# Altium PCB PCB1.PcbDoc
Units mil, origin at the board's own origin, x right, y up, seen from the top; angles counter-clockwise.
Board outline 1885 x 1460 mil, 4 copper layers (Top Layer, Int1 (GND), Int2 (PWR), Bottom Layer), stack 53.912 mil thick; 69 components, 53 nets, 227 pads, 67 vias.
Unrouted connection lines stored in the file: 5.
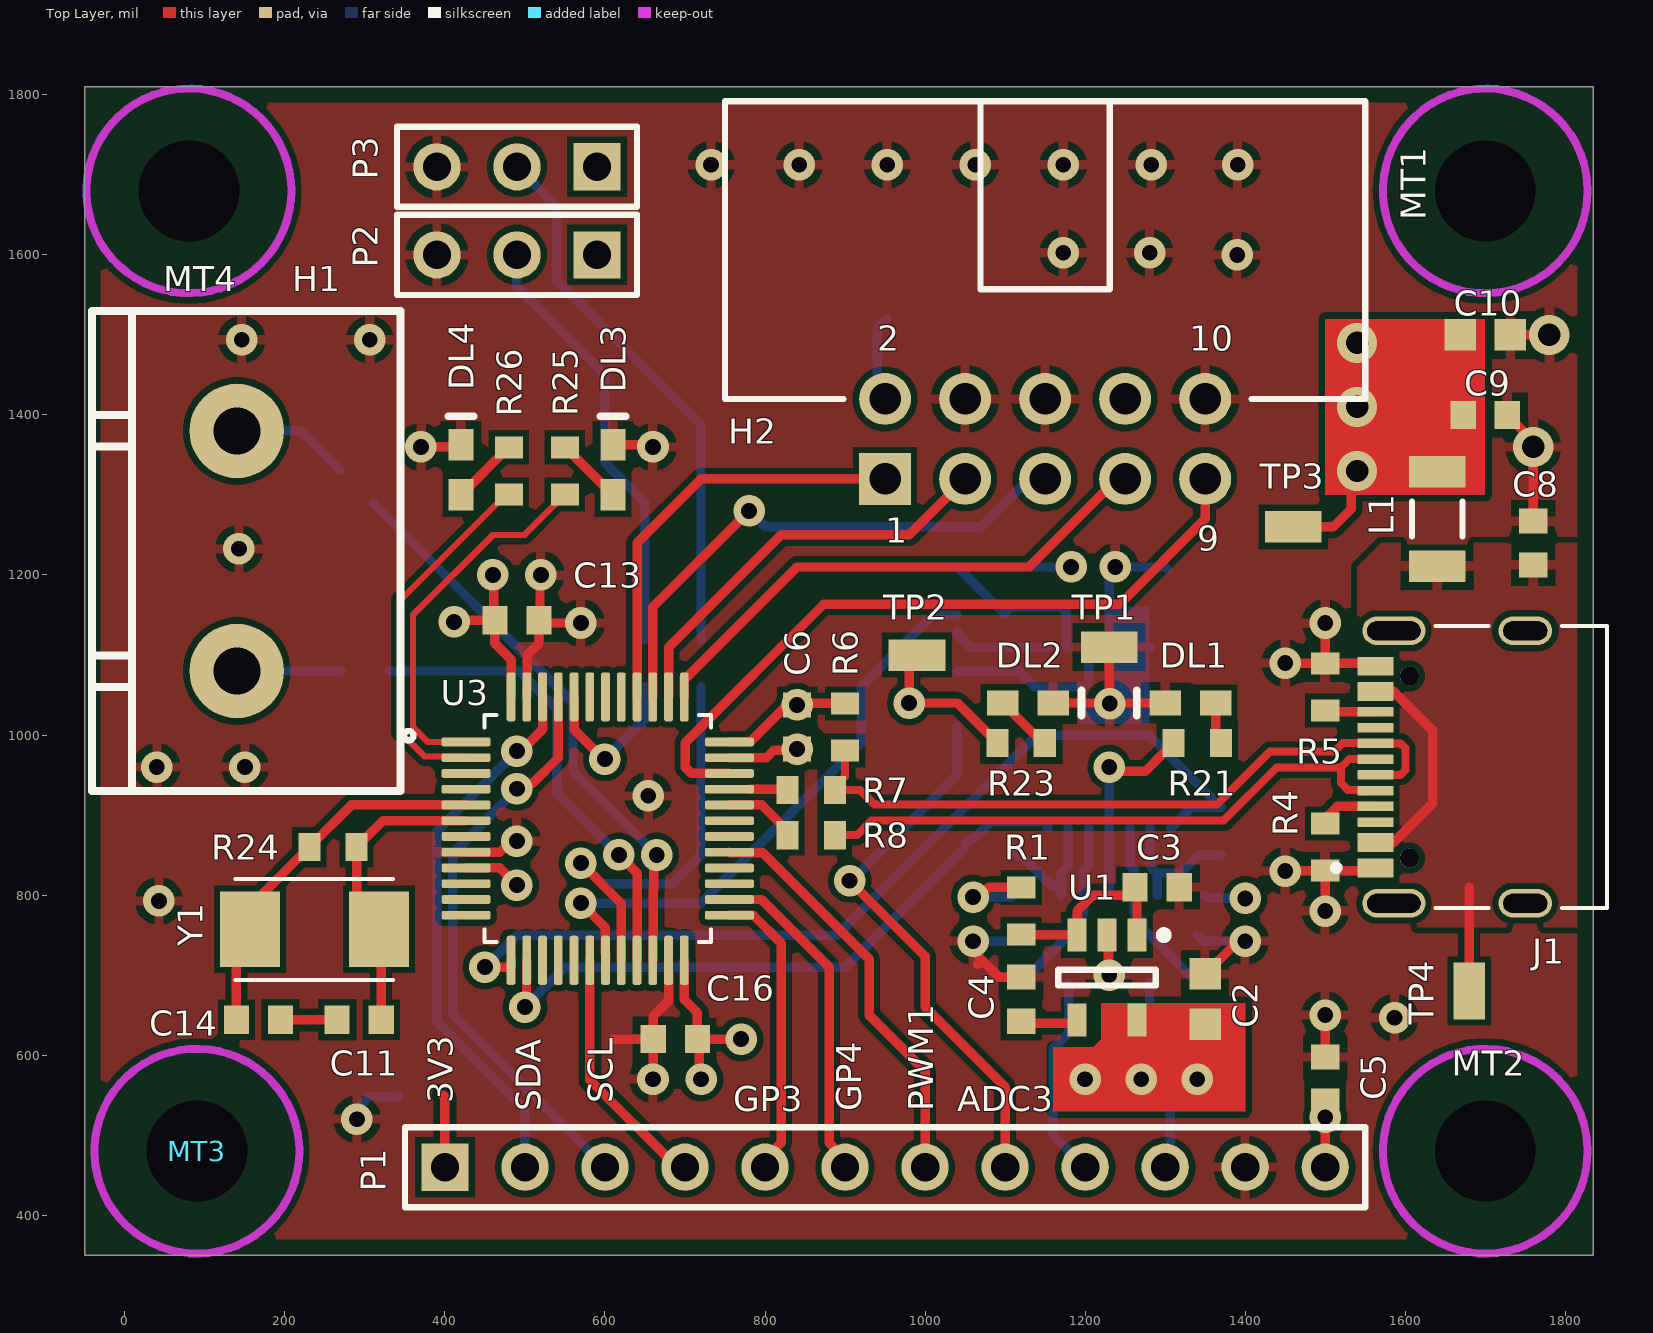
[diagram p0: Top Layer view]
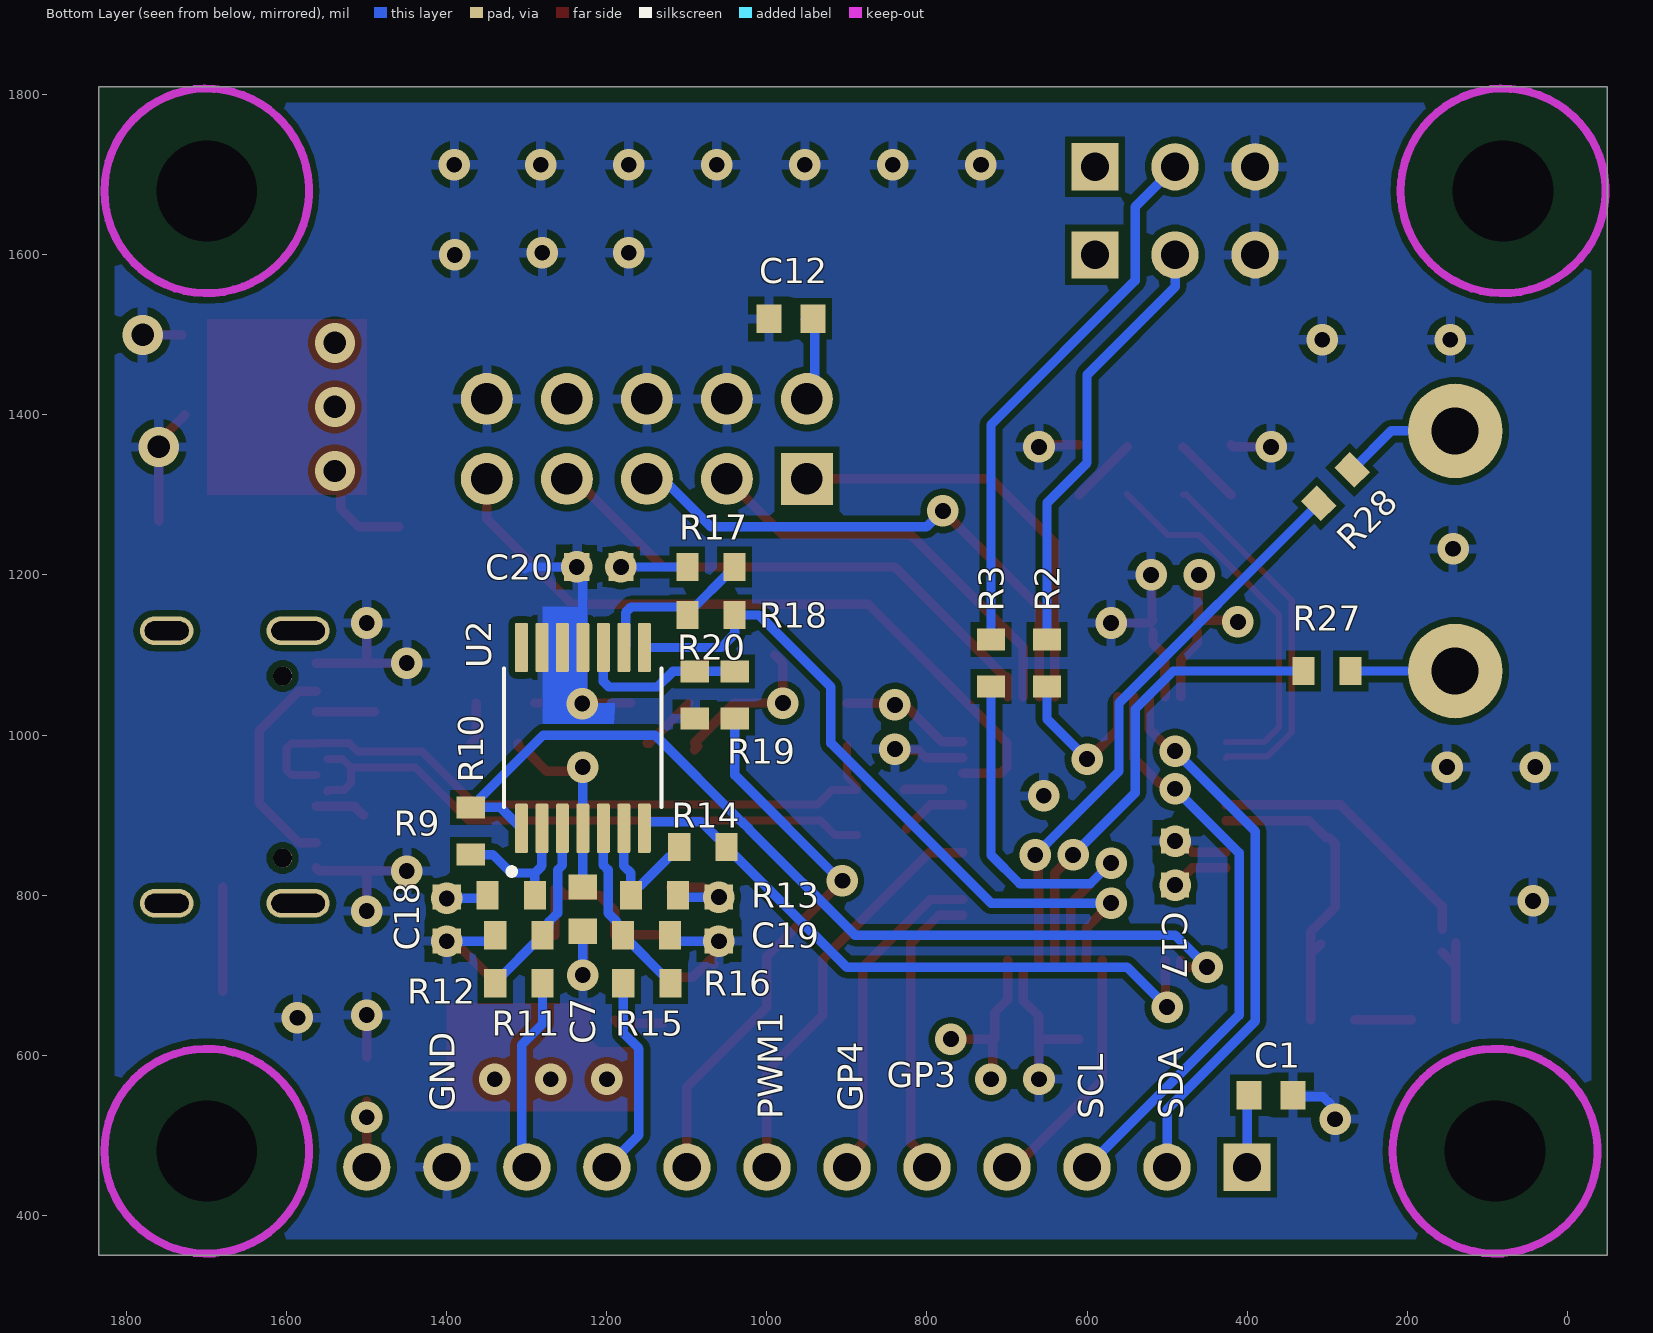
[diagram p1: Bottom Layer view, seen from below]
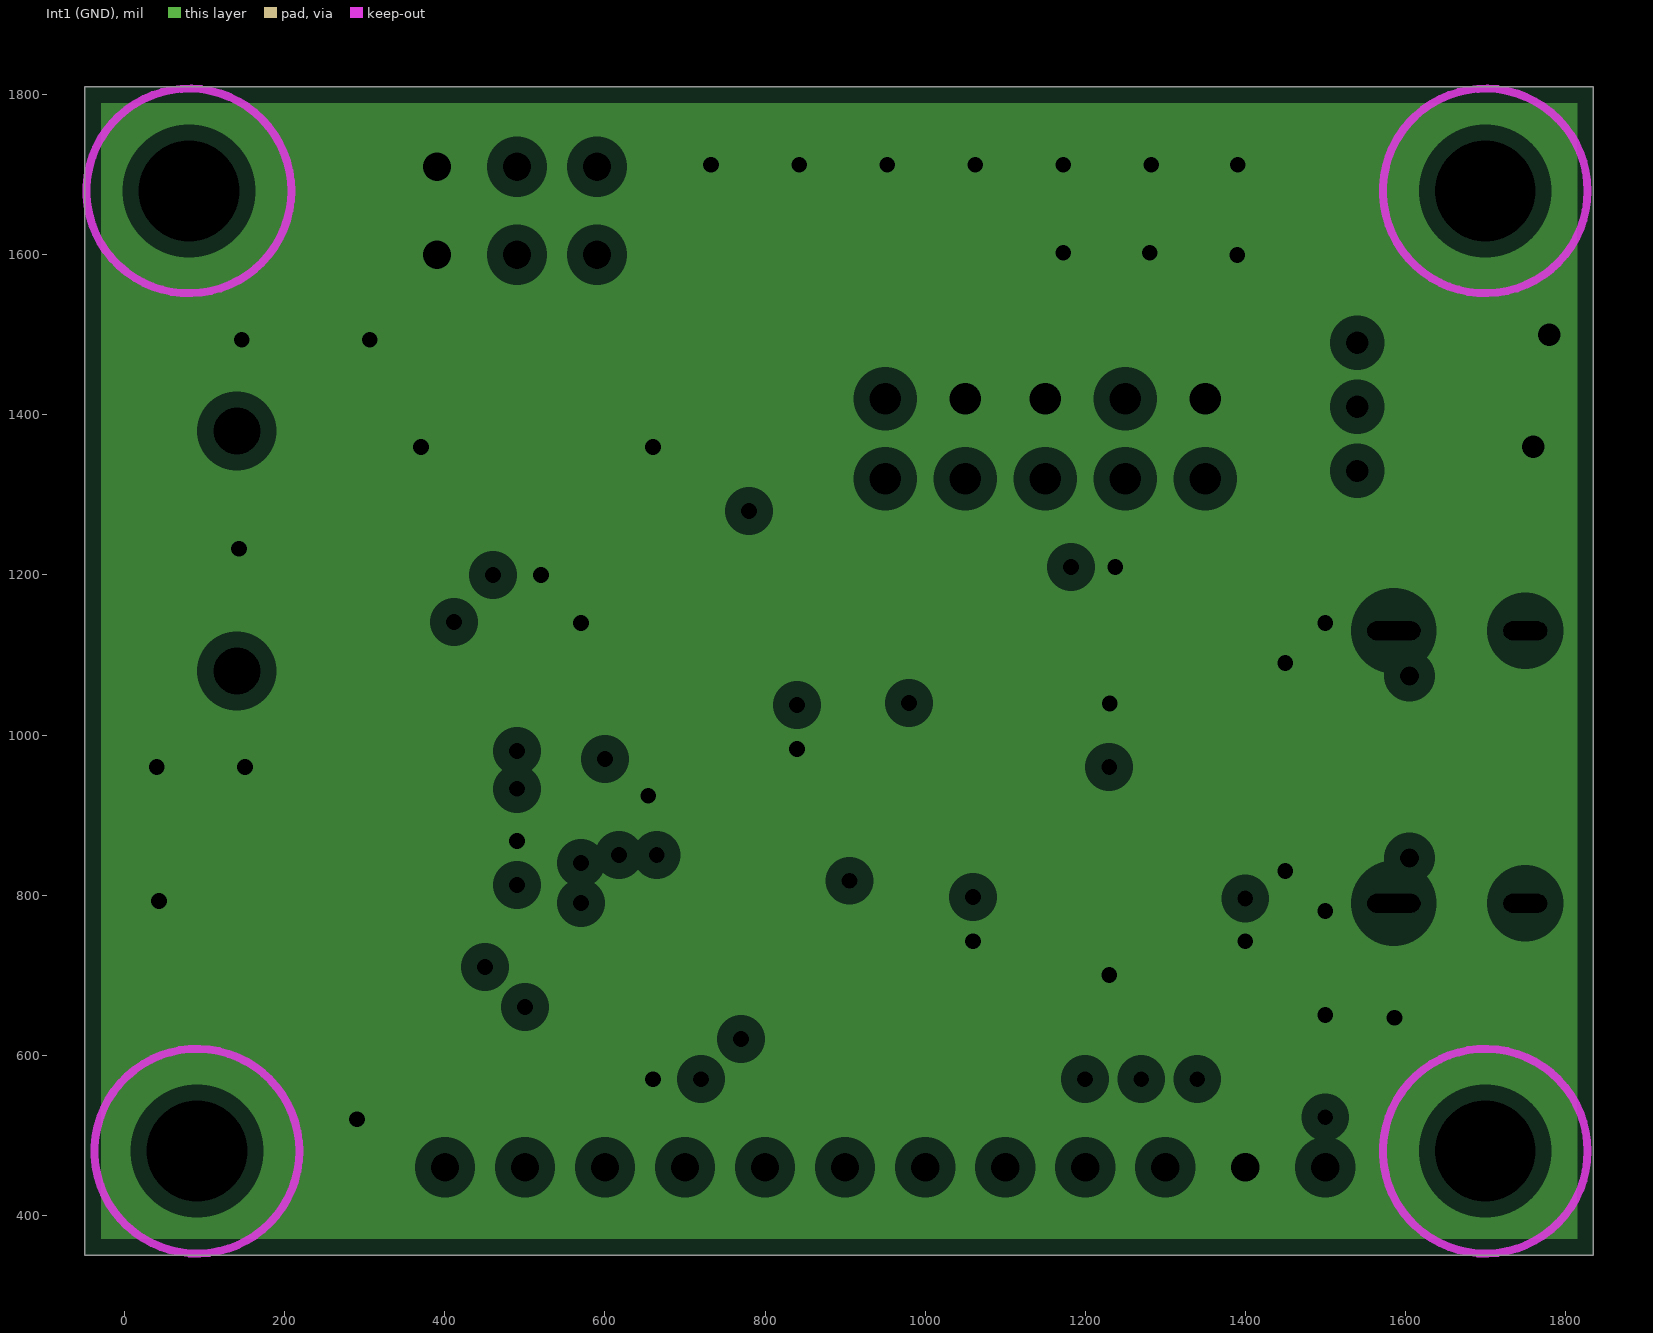
[diagram p2: Int1 (GND), clearances drawn from the general rule]
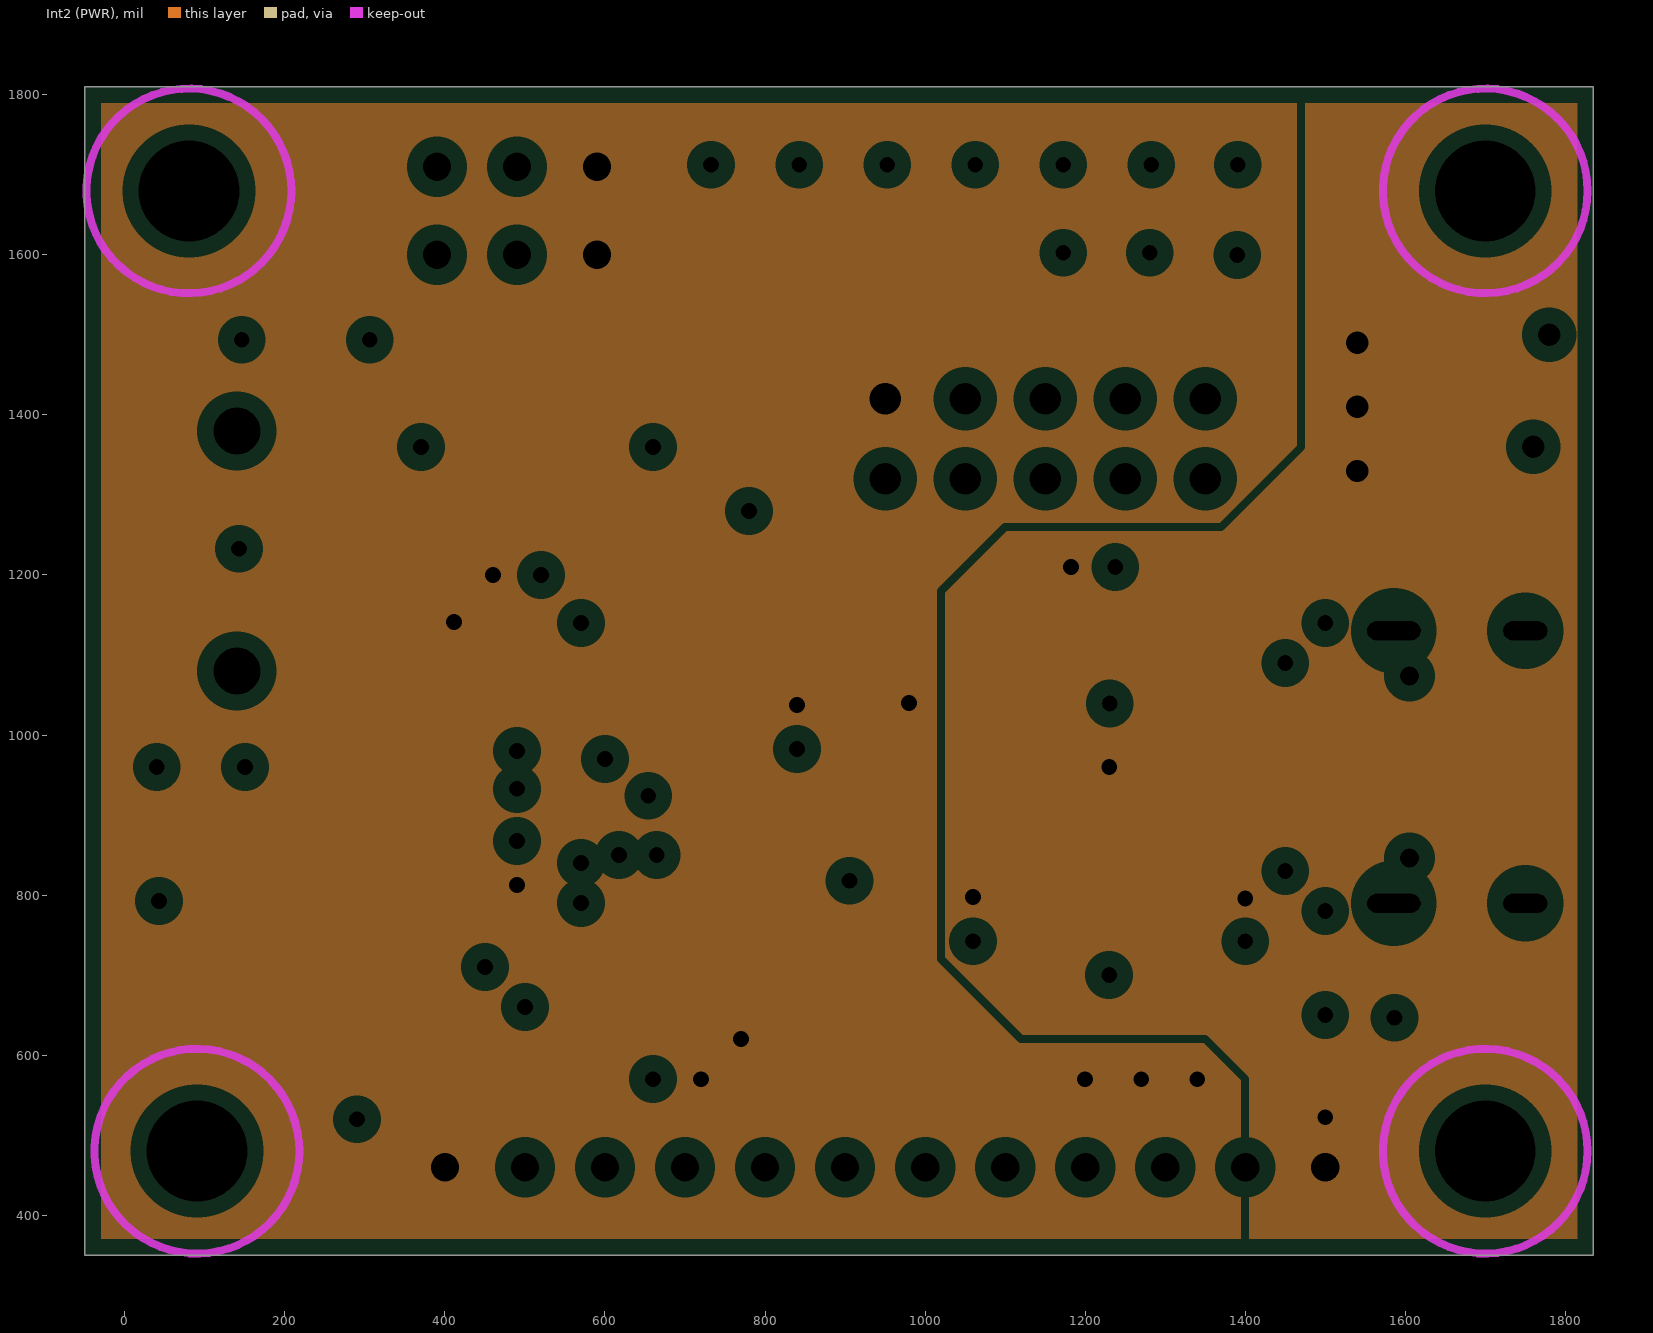
[diagram p3: Int2 (PWR), clearances drawn from the general rule]

## Layer stack, top to bottom
Top Solder: solder mask 1, SM-001, Dk 4
Top Layer: signal copper 1.378
Dielectric 1: prepreg 5.1, PP-017, Dk 4.3
Dielectric 2: prepreg 5.1, PP-017, Dk 4.3
Int1 (GND): plane copper 1.378, net GND
Dielectric 3: core 28, Core-039, Dk 4.8
Int2 (PWR): plane copper 1.378, net (Multiple Nets)
Dielectric 4: prepreg 5.1, PP-017, Dk 4.3
Dielectric 5: prepreg 5.1, PP-017, Dk 4.3
Bottom Layer: signal copper 1.378
Bottom Solder: solder mask 1, SM-001, Dk 4

## Board outline
-50,350 1835,350 1835,1810 -50,1810

## Design rules (kind name [scope] priority, off if disabled: settings)
BoardOutlineClearance [All] p1: gap=19.68 ignorepadtopadclearanceinfootprint=FALSE
Clearance GND_POLY [InNamedPolygon('GND')] p1: gap=10 ignorepadtopadclearanceinfootprint=FALSE
Clearance Min_Clearance_Circuit_Labs [All] p2: gap=7.87 ignorepadtopadclearanceinfootprint=FALSE
DiffPairsRouting [All] p1: maxlimit=10 minlimit=10 mostfreqgap=10 toplayer_minwidth=10 toplayer_maxwidth=10 toplayer_prefwidth=10 bottomlayer_minwidth=10 bottomlayer_maxwidth=10 bottomlayer_prefwidth=10 maxuncoupledlength=500
FanoutControl Fanout_BGA [IsBGA] p1 off: bgadir=Out bgaviamode=Centered fanoutstyle=Auto fanoutdirection=Alternating viagrid=1 // Fanout_BGA (Default Rule)
Height [All] p1: minheight=0 maxheight=2000 prefheight=500
HoleSize [All] p1: absolutevalues=TRUE maxlimit=393.7 minlimit=11.81 maxpercent=80.000 minpercent=20.000
MinimumAnnularRing [All] p1: minimumring=3.94
MinimumSolderMaskSliver [All] p1: minsoldermaskwidth=4
NetAntennae [All] p1: netantennaetolerance=39.37
PlaneClearance [All] p1: clearance=20
PlaneConnect [All] p1: planeconnectstyle=Relief reliefexpansion=20 reliefentries=4 reliefconductorwidth=10 reliefairgap=10
PolygonConnect [All] p1: connectstyle=Relief reliefconductorwidth=12 reliefentries=4 polygonreliefangle="90 Angle" airgapwidth=10
RoutingVias [All] p1: holewidth=19.68 width=39.37 viastyle="Through Hole" minholewidth=11.81 minwidth=31.5 maxholewidth=39.37 maxwidth=78.74
SMDNeckDown [All] p1 off: percent=50.000
SMDToCorner [All] p1: distance=98425
SMDToPlane [All] p1: distance=1968504
SilkToSolderMaskClearance SilkscreenOverComponentPads [IsPad] p1: minsilkscreentomaskgap=7.87 clearancetoexposedcopper=TRUE
SolderMaskExpansion [All] p1: expansion=4 istentingtop=FALSE
SupplyNets "Schematic Supply Nets_3" [InNet('GND')] p1: voltage=0.000
SupplyNets "Schematic Supply Nets_2" [InNet('VUSB')] p2: voltage=0.000
SupplyNets "Schematic Supply Nets_1" [InNet('5V')] p3: voltage=0.000
SupplyNets "Schematic Supply Nets" [InNet('3V3')] p4: voltage=0.000
ViasUnderSMD [All] p1: allowed=FALSE
Width [All] p1: maxlimit=78.74 minlimit=7.87 preferedwidth=11.81
21 further rules are at their usual default settings.

## Classes and differential pairs
differential pair DD: +DD_P -DD_N

## Components (designator, comment, footprint, x,y, rotation, side; value= is the part's Value field where it differs from the comment)
C1 "100nF" CAPC1608L 370,550 r180 bottom
C2 "4.7uF" CAPC1608N 1350,670 r90 top
C3 "1uF" CAPC1608L 1290,810 r0 top
C4 "10nF" CAPC1608L 1120,670 r90 top
C5 "100nF" CAPC1608L 1500,570 r270 top
C6 "100nF" CAPC1608L 840,1010 r90 top
C7 "100nF" CAPC1608L 1230,782.44 r90 bottom
C8 "100nF" CAPC1608L 1760,1240 r90 top
C9 "100nF" CAPC1608L 1700,1400 r0 top
C10 "4.7uF" CAPC1608N 1700,1500 r180 top
C11 "10pF" CAPC1608L 292.79,643.98 r0 top value=20pF
C12 "100nF" CAPC1608L 970,1520 r180 bottom
C13 "100nF" CAPC1608L 489.96,1143.47 r180 top
C14 "10pF" CAPC1608L 166.96,643.98 r180 top value=20pF
C16 "100nF" CAPC1608L 687.95,620.21 r0 top
C17 "100nF" CAPC1608L 490,840 r270 bottom
C18 "100nF" CAPC1608L 1400,770 r90 bottom
C19 "100nF" CAPC1608L 1060,770 r90 bottom
C20 "100nF" CAPC1608L 1210,1210 r180 bottom
DL1 "Blue" WL-SMCW0603 1300,1040 r0 top
DL2 "Green" WL-SMCW0603 1160,1040 r180 top
DL3 "Red" WL-SMCW0603 610,1362.99 r270 top
DL4 "Green" WL-SMCW0603 420,1362.99 r270 top
H1 "TERM_BLK_2POS" TERM_BLK_2POS 140,1080 r90 top
H2 "HDR_IDC_5X2H_RA" IDC2.54-H10C 1150,1420 r0 top
J1 "TYPE-C-31-M-12" HRO_TYPE-C-31-M-12 1750,960 r90 top
L1 "1A max, Idc 0.3R," INDC3216L 1640,1270 r90 top
MT1 "M3.2 NPTH" MNT-HOLE_3.2mm_NPTH 1700,1680 r0 top
MT2 "M3.2 NPTH" MNT-HOLE_3.2mm_NPTH 1700,480 r0 top
MT3 "M3.2 NPTH" MNT-HOLE_3.2mm_NPTH 90,480 r0 top
MT4 "M3.2 NPTH" MNT-HOLE_3.2mm_NPTH 80,1680 r0 top
P1 "JA_PIN_Header 12" HDR1X12 400,460 r0 top
P2 "JA_PIN_Header 3" HDR1X3 590,1600 r180 top
P3 "JA_PIN_Header 3" HDR1X3 590,1710 r180 top
R1 "0R" RESC1608L 1120,780 r90 top
R2 "100K" RESC1608L 650,1090 r90 bottom
R3 "100K" RESC1608L 720,1090 r270 bottom
R4 "5K1" RESC1608L 1500,860 r270 top
R5 "5k1" RESC1608L 1500,1060 r90 top
R6 "1K5" RESC1608L 900,1010 r270 top
R7 "27" RESC1608L 857.66,931.34 r0 top
R8 "27" RESC1608L 857.66,874.77 r0 top
R9 "1K0" RESC1608L 1319.53,800 r180 bottom
R10 "2K0" RESC1608L 1370,880 r90 bottom
R11 "430R" RESC1608L 1310,690 r0 bottom
R12 "430R" RESC1608L 1310,750 r180 bottom
R13 "1K0" RESC1608L 1140.47,800 r0 bottom
R14 "2K0" RESC1608L 1080,860 r180 bottom
R15 "430R" RESC1608L 1150,690 r180 bottom
R16 "430R" RESC1608L 1150.47,750 r0 bottom
R17 "1K0" RESC1608L 1070,1210 r180 bottom
R18 "2K0" RESC1608L 1070,1150 r180 bottom
R19 "430R" RESC1608L 1040,1050 r90 bottom
R20 "430R" RESC1608L 1090,1050 r90 bottom
R21 "1K5" RESC1608L 1340,990 r180 top
R23 "2K" RESC1608L 1120,990 r180 top
R24 "10K" RESC1608L 260,860 r0 top
R25 "3K" RESC1608L 550,1330 r270 top
R26 "2K" RESC1608L 480,1330 r270 top
R27 "100R" RESC1608L 300,1080 r180 bottom
R28 "100R" RESC1608L 289.53,1310.47 r135 bottom
TP1 "TP_0603" TP_0603 1230,1110 r180 top
TP2 "TP_0603" TP_0603 990,1100 r0 top
TP3 "TP_0603" TP_0603 1460,1260 r0 top
TP4 "TP_0603" TP_0603 1680,680 r90 top
U1 "CAT6219-330TDGT3" SOT95P280X145-5N 1227.4,696.85 r270 top
U2 "LMV774MT" SOP65P640X120-14N 1230,996.38 r90 bottom
U3 "STM32F103C8T6" QFP50P900X900X160-48N 590.89,883.08 r0 top
Y1 "ABM3-8.000MHZ-D2Y-T" XTAL_ABM3-8.000MHZ-D2Y-T 236.95,757.12 r0 top

## Footprints (in the part's own frame and the unit in brackets; to place one, negate y for a bottom-side part, rotate by r counter-clockwise, add the part's x,y. Pads: shape width x height; smd on the part's side, far side on the other; paste and mask are expansions set on the pad)
CAPC1608L [mm] "Chip Capacitor, Body 1.6x0.8mm, IPC High Density"
  rect 0.8x0.9 smd: 1(-0.7,0) 2(0.7,0)
  body extent -0.87,-0.48 0.87,0.48, height 0.85
CAPC1608N [mm] "Chip Capacitor, Body 1.6x0.8mm, IPC Medium Density"
  rect 1x1 smd: 1(-0.8,0) 2(0.8,0)
  body extent -0.87,-0.48 0.87,0.48, height 0.85
HDR1X3 [mm] "Connector; Header; 3 Position"
  rect 1.5x1.5 hole 0.9: 1(0,0)
  round 1.5 hole 0.9: 2(2.54,0) 3(5.08,0)
  silkscreen extent -1.27,-1.27 6.35,1.27, body extent -1.27,-1.27 6.35,1.27, height 8.89
HDR1X12 [mm] "Connector; Header; 12 Position"
  rect 1.5x1.5 hole 0.9: 1(0,0)
  round 1.5 hole 0.9: 2(2.54,0) 3(5.08,0) 4(7.62,0) 5(10.16,0) 6(12.7,0) 7(15.24,0) 8(17.78,0) 9(20.32,0) 10(22.86,0) 11(25.4,0) 12(27.94,0)
  silkscreen extent -1.27,-1.27 29.21,1.27, body extent -1.24,-1.24 29.24,1.3, height 8.89
HRO_TYPE-C-31-M-12 [mm]
  rect 0.6x1.14 smd mask+0.05: A1_B12(-3.2,4.75) A4_B9(-2.4,4.75) B1_A12(3.2,4.75) B4_A9(2.4,4.75)
  rect 0.3x1.14 smd mask+0.05: A5(-1.25,4.75) A6(-0.25,4.75) A7(0.25,4.75) A8(1.25,4.75) B5(1.75,4.75) B6(0.75,4.75) B7(-0.75,4.75) B8(-1.75,4.75)
  oval 0.9x2 hole 0.6 slot 1.7 at 90 deg: S1(-4.325,4.17) S2(4.325,4.17)
  oval 0.9x1.7 hole 0.6 slot 1.4 at 90 deg: S3(-4.325,0) S4(4.325,0)
  round 0.6 hole 0.6 unplated: ""(-2.89,3.68) ""(2.89,3.68)
  silkscreen extent -4.47,-2.6 4.47,6.1, body extent -4.47,-2.6 4.47,5.31, height 3.31
IDC2.54-H10C [mm] "Connector; IDC, Low Profile Male Header, Thru-Hole; 10 Position; Right Angle; Pitch 2.54 mm; Body 20.32 x 8.9 x 9.2 mm (LxWxH)"
  rect 1.65x1.65 hole 1: 1(-5.08,-2.54)
  round 1.65 hole 1: 2(-5.08,0) 3(-2.54,-2.54) 4(-2.54,0) 5(0,-2.54) 6(0,0) 7(2.54,-2.54) 8(2.54,0) 9(5.08,-2.54) 10(5.08,0)
  silkscreen extent -10.16,0 10.16,9.45, body extent -10.16,0 10.16,9.45, height 9.2
INDC3216L [mm] "Chip Inductor, Body 3.2x1.6mm, IPC High Density"
  rect 1x1.8 smd: 1(-1.5,0) 2(1.5,0)
  silkscreen extent -0.55,-0.8 0.55,0.8, body extent -1.75,-0.95 1.75,0.95, height 1.9
MNT-HOLE_3.2mm_NPTH [mm] "Mounting Hole 3.2mm non plated"
  round 0 hole 3.2 unplated: 1(0,0)
  Keep-Out Layer circle w0.254: c0,0 r3.25
QFP50P900X900X160-48N [mm]
  rrect50% 1.56x0.28 smd: 1(-4.18,2.75) 2(-4.18,2.25) 3(-4.18,1.75) 4(-4.18,1.25) 5(-4.18,0.75) 6(-4.18,0.25) 7(-4.18,-0.25) 8(-4.18,-0.75) 9(-4.18,-1.25) 10(-4.18,-1.75) 11(-4.18,-2.25) 12(-4.18,-2.75) 25(4.18,-2.75) 26(4.18,-2.25) 27(4.18,-1.75) 28(4.18,-1.25) 29(4.18,-0.75) 30(4.18,-0.25) 31(4.18,0.25) 32(4.18,0.75) 33(4.18,1.25) 34(4.18,1.75) 35(4.18,2.25) 36(4.18,2.75)
  rrect50% 0.28x1.56 smd: 13(-2.75,-4.18) 14(-2.25,-4.18) 15(-1.75,-4.18) 16(-1.25,-4.18) 17(-0.75,-4.18) 18(-0.25,-4.18) 19(0.25,-4.18) 20(0.75,-4.18) 21(1.25,-4.18) 22(1.75,-4.18) 23(2.25,-4.18) 24(2.75,-4.18) 37(2.75,4.18) 38(2.25,4.18) 39(1.75,4.18) 40(1.25,4.18) 41(0.75,4.18) 42(0.25,4.18) 43(-0.25,4.18) 44(-0.75,4.18) 45(-1.25,4.18) 46(-1.75,4.18) 47(-2.25,4.18) 48(-2.75,4.18)
  silkscreen extent -6.15,-3.6 3.6,3.6, body extent -4.5,-4.5 4.5,4.5, height 1.6
RESC1608L [mm] "Chip Resistor, Body 1.6x0.8mm, IPC High Density"
  rect 0.7x0.9 smd: 1(-0.75,0) 2(0.75,0)
  body extent -0.85,-0.48 0.85,0.48, height 0.9
SOP65P640X120-14N [mm]
  rrect25% 1.57x0.41 smd: 1(-2.87,1.95) 2(-2.87,1.3) 3(-2.87,0.65) 4(-2.87,0) 5(-2.87,-0.65) 6(-2.87,-1.3) 7(-2.87,-1.95) 8(2.87,-1.95) 9(2.87,-1.3) 10(2.87,-0.65) 11(2.87,0) 12(2.87,0.65) 13(2.87,1.3) 14(2.87,1.95)
  silkscreen extent -4.34,-2.5 2.2,2.5, body extent -3.2,-2.5 3.2,2.5, height 1.2
SOT95P280X145-5N [mm] "SOT23, 5-Leads, Body 2.90x2.80mm, Pitch 0.95mm, IPC Medium Density"
  rect 1.05x0.6 smd: 1(-1.35,0.95) 2(-1.35,0) 3(-1.35,-0.95) 4(1.35,-0.95) 5(1.35,0.95)
  silkscreen extent -1.47,-1.55 0.25,1.93, body extent -0.87,-1.52 0.87,1.53, height 1.45
TERM_BLK_2POS [mm]
  round 3 hole 1.5: 1(0,0) 2(7.62,0)
  silkscreen extent -3.81,-5.2 11.43,4.6
TP_0603 [mm] "TestPoint 0603"
  rect 1.8x1 smd: 1(0,0)
  body extent -1,-0.6 1,0.6, height 0.9
WL-SMCW0603 [mm] "2.4 x 0.8 x 0.7mm LED"
  rect 1x0.8 smd: 1(0,0) 2(1.6,0)
  silkscreen extent -0.9,-0.4 -0.9,0.4
XTAL_ABM3-8.000MHZ-D2Y-T [mm]
  rect 1.9x2.4 smd: 1(-2.05,0) 2(2.05,0)
  silkscreen extent -2.5,-1.6 2.5,1.6, body extent -2.5,-1.6 2.5,1.6, height 1.3

## Part data
C1 C4 C5 C6 C7 C8 C9 C12 C13 C16 C17 C18 C19 C20: library part CC_10nF_0603, "CAP CER 10nF X7R +-10% 50V 0603", Code_IPC="1608 [0603]", PackageReference=0603, Storage Location="PCB Assembly WS", Supplier="ECE Dept"
C2 C10: library part CC_4.7uF_0603, "CAP CER 4.7uF X5R +-20%  10V 0603", Max Voltage=10V, Code_IPC=2012[0805], Note="Footprint corresponds to dimensions for bulk cassette packaging. This case size has tightened tolerances.", PackageReference=0805, Storage Location="PCB Assembly WS", Supplier="ECE Dept"
C3: library part CC_1uF_0603, "CAP CER 1uF Y5V -20% +80% 16V 0603", Max Voltage=16V, Code_IPC="1608 [0603]", PackageReference=0603, Storage Location="PCB Assembly WS", Supplier="ECE Dept"
C11 C14: library part CC_27pF_0603, "CAP CER 27pF NPO/COG +-5% 50V 0603", Code_IPC="1608 [0603]", PackageReference=0603, Storage Location="PCB Assembly WS", Supplier="ECE Dept"
DL1: library part DL_150060BS75000, "LED Blue 270mcd 0603 SMD", Forward Current If=30, Forward Voltage=3.2, Manufacturer="WURTH ELEKTRONIK", Manufacturer Part Number=150060BS75000, Supplier Part Number 1=2322069, LED Colour=Blue, Luminous Intensity=270, Pricing="1=0.3844, 50=0.3252, 100=0.2957, 500=0.2365 (NZD)", Storage Location="PCB Assembly WS", Supplier="ECE Dept", Supplier 1=Farnell, Viewing Angle=120°, Wavelength Typ=470
DL2 DL4: library part DL_150060GS75000, "LED Green 430mcd 0603 SMD", Forward Current If=30, Forward Voltage=3.2, Manufacturer="WURTH ELEKTRONIK", Manufacturer Part Number=150060GS75000, Supplier Part Number 1=2322070, LED Colour=Green, LED Mounting=SMD, Lens Shape=Rectangular, Luminous Intensity=430, Storage Location="PCB Assembly WS", Supplier="ECE Dept", Supplier 1=Farnell, Viewing Angle=140°, Wavelength Typ=520
DL3: library part DL_150060RS75000, "LED Red 250mcd 0603 SMD", Forward Current If=30, Forward Voltage=2, Manufacturer="WURTH ELEKTRONIK", Manufacturer Part Number=150060RS75000, Supplier Part Number 1=2322071, LED Colour=Red, LED Mounting=SMD, Lens Shape=Rectangular, Luminous Intensity=250, Storage Location="PCB Assembly WS", Supplier="ECE Dept", Supplier 1=Farnell, Viewing Angle=140°, Wavelength Typ=625
H1: "2 Position Terminal Block 7.62mm spacing"
H2: library part JA_HDR_IDC_5X2_R/A, "IDC Header, 2.54mm, 10-Pin, Right Angle", Supplier Part Number 1=1106840, Storage Location="ECE Dept Store", Supplier="ECE Dept", Supplier 1=Farnell
J1: library part CMP-013-000000-1, "USB Connectors 24 Receptacle 1 8.94*7.3mm RoHS", Package=Package, Availability="Not in stock", Check_prices=https://www.snapeda.com/parts/TYPE-C-31-M-12/HRO+Electronics+Co.%252C+Ltd./view-part/?ref=eda, Component Type=Standard, Design Item ID=TYPE-C-31-M-12, MF="HRO Electronics Co., Ltd.", MP=TYPE-C-31-M-12, Pin Count=16, Price=None, SnapEDA_Link=https://www.snapeda.com/parts/TYPE-C-31-M-12/HRO+Electronics+Co.%252C+Ltd./view-part/?ref=snap, Source=TYPE-C-31-M-12.SchLib
L1: library part IN_Ferrite-Bead, "Ferrite Bead, Rdc 0.3R, Z100MHZ 600R, Imax 1A, SMD 1206", DC Current Rating=1, DC Resistance Max=0.08, Ferrite Case Style="1206 ^3216 Metric]", Frequency Range="50MHz to 1", Impedance Tolerance="± 25%", Manufacturer=FAIR-RITE, Manufacturer Part Number=2512066017Y1, Supplier Part Number 1=1612060, Ferrite Mounting=SMD, Impedance=600, Manufacturer PN=2512066017Y1, Storage Location="PCB Assembly WS", Supplier="ECE Dept", Supplier 1=Farnell
MT1 MT2 MT3 MT4: library part MC_M3.2_HOLE, "Fixing M3.2 Mount Hole NPTH", Manufacturer=Hi-Q, Manufacturer PN="3BV series M3 Clearance", Price=0, Supplier="ECE Dept"
P1: "Header, 12-Pin", LatestRevisionDate=17-Jul-2002, LatestRevisionNote="Re-released for DXP Platform.", Publisher="Altium Limited"
P2 P3: "Header, 3-Pin", LatestRevisionDate=17-Jul-2002, LatestRevisionNote="Re-released for DXP Platform.", Publisher="Altium Limited"
R1: library part RS_0R0, "RES 0.0 OHM 1/10W 5% 0603 SMD", Storage Location="PCB Assembly WS", Supplier="ECE Dept"
R2 R3 R4 R5: library part RS_100K, "RES 100K OHM 1/10W 5% 0603 SMD", Storage Location="PCB Assembly WS", Supplier="ECE Dept"
R6 R7 R8 R21 R23 R24 R26: library part RS_2K, "RES 2K OHM 1/10W 5% 0603 SMD", Storage Location="PCB Assembly WS", Supplier="ECE Dept"
R9 R10 R11 R12 R13 R14 R15 R16 R17 R18 R19 R20: library part RS_430R, "RES 430 OHM 1/10W 5% 0603 SMD", Storage Location="PCB Assembly WS", Supplier="ECE Dept"
R25: library part RS_3K, "RES 3K OHM 1/10W 5% 0603 SMD", Storage Location="PCB Assembly WS", Supplier="ECE Dept"
R27 R28: library part RS_100R, "RES 100 OHM 1/10W 5% 0603 SMD", Storage Location="PCB Assembly WS", Supplier="ECE Dept"
TP1 TP2 TP3 TP4: "Test Point 1.65X0.9X1.2mm SMD", Manufacturer="TE Connectivity AMP Connectors", Manufacturer Part Number=1625854-3, Supplier Part Number 1=A106145CT-ND, Mounting Type="Surface Mount", Supplier 1=Digi-Key, Terminal="0.063\" x 0.031\" x 0.045\" (1.60mm x 0.80mm x 1.15mm)", Type="PC Test Point"
U1: library part SV_CAT6219-330TDGT3, "IC REG LIN 3.3V 500MA TSOT23-5", Base Part Number=CAT6219, Current - Output=500mA, Package / Case="SOT-23-5 Thin, TSOT-23-5", Supplier Device Package=TSOT-23-5, Voltage - Input (Max)=5.5V, Voltage - Output (Min/Fixed)=3.3V, Voltage Dropout (Max)="0.5V @ 500mA", ComponentLink1Description=http://www.onsemi.com/pub/Collateral/CAT6219-D.PDF, ComponentLink1URL=http://www.onsemi.com/pub/Collateral/CAT6219-D.PDF, ComponentLink2Description="CAT6219 Datasheet", ComponentLink2URL=\\maxwell\elecapp\AltiumDesigner\Libraries\DatasheetsNew\ENCE461\CAT6219-D.PDF, Manufacturer Part Number=CAT6219-330TDGT3, Supplier=Digi-Key, Supplier 1=Digi-Key, Supplier Part Number=CAT6219-330TDGT3
U2: library part CMP-014-00002-1, "Quad, Low Offset, Low Noise, RRO Operational Amplifiers", Case/Package="TSSOP-14 Texas Instruments", Check_prices=https://www.snapeda.com/parts/LMV774MTX/NOPB/Texas+Instruments/view-part/?ref=eda, Component Type=Standard, Design Item ID=LMV774MT, Digi-Key_Part_Number=LMV774MTX/NOPBTR-ND, MF="Texas Instruments", MP=LMV774MTX/NOPB, Pins=14, Purchase-URL=https://pricing.snapeda.com/search/part/LMV774MTX/NOPB/?ref=eda, SnapEDA_Link=https://www.snapeda.com/parts/LMV774MTX/NOPB/Texas+Instruments/view-part/?ref=snap, Source=LMV774MT.SchLib
U3: library part CMP-031-00007-1, "ARM® Cortex®-M3 STM32F1 Microcontroller IC 32-Bit 72MHz 64KB (64K x 8) FLASH 48-LQFP (7x7)", Case/Package="LQFP-48 STMicroelectronics", Check_prices=https://www.snapeda.com/parts/STM32F103C8T6/STMicroelectronics/view-part/?ref=eda, Component Type=Standard, Design Item ID=STM32F103C8T6, MF=STMicroelectronics, MP=STM32F103C8T6, Pins=48, SnapEDA_Link=https://www.snapeda.com/parts/STM32F103C8T6/STMicroelectronics/view-part/?ref=snap, Source=STM32F103C8T6.SchLib
Y1: library part CMP-003-00030-1, "8 MHz Â±20ppm Crystal 18pF 140 Ohms 2-SMD, No Lead", Case/Package="SMD-2 Abracon", Availability="In Stock", Check_prices=https://www.snapeda.com/parts/ABM3-8.000MHZ-D2Y-T/Abracon+LLC/view-part/?ref=eda, Component Type=Standard, Design Item ID=ABM3-8.000MHZ-D2Y-T, MF=Abracon, MP=ABM3-8.000MHZ-D2Y-T, Pins=2, Price=None, Purchase-URL=https://pricing.snapeda.com/search/part/ABM3-8.000MHZ-D2Y-T/?ref=eda, SnapEDA_Link=https://www.snapeda.com/parts/ABM3-8.000MHZ-D2Y-T/Abracon+LLC/view-part/?ref=snap, Source=ABM3-8.000MHZ-D2Y-T.SchLib

## Via types
v1: diameter 39.37, hole 19.68, Top Layer to Bottom Layer, 62 vias
v2: diameter 50, hole 28, Top Layer to Bottom Layer, 5 vias

## Nets (pads, with @x,y where several pads share a name; then routed paths per layer and width w, separated by ;. In a path a pad name is that pad's centre, name@x,y a point inside that pad or via, vN(x,y) a via of type N, cw(c..) or ccw(c..) an arc to the next point about the centre after c; other vN are vias at no path point)
3V3: C1.1 C2.1 C6.2 C12.2 C13.2 C16.2 C17.2 H2.2 P1.1 P2.1 P3.1 R6.1 R23.2 TP2.1 U1.5 U3.9 U3.24 U3.36 U3.48 | length 1314.8
  Top Layer w11.81: 397.56,550 400,547.56 P1.1 ; v1(411.34,1141.34) 413.47,1143.47 C13.2 461.2,1144.67 461.2,1198.8 v1(460,1200) ; U3.9 468.57,833.87 v1(490,812.44) ; C13.2@462.41,1129.33 462.41,1114.46 482.62,1094.24 U3.48 ; U3.24 699.16,669.27 715.51,652.92 C16.2 ; v1(720,570) 717.76,572.24 717.76,617.96 C16.2 ; U3.36 781.35,991.35 823.9,1033.9 833.67,1033.9 C6.2@843.52,1043.75 ; v1(770,620) 715.72,620 C16.2 ; v1(840,1037.56) 841.97,1039.53 R6.1 ; TP2.1 980,1090 v1(980,1040) 1040.47,1040 R23.2 ; R23.2@1086.22,986.06 R23.2@1090.47,981.81 ; 1254.73,604.73 1250.48,600.48 1250.48,590.7 1270,571.18 v1(1270,570) v1(1340,570) ; U1.5 1270,638.5 1330,638.5
  Bottom Layer w11.81: C1.1 400,547.56 P1.1 ; H2.2@940,1430 940,1507.56 C12.2@952.44,1520
  other v1: 1200,570
5V: C5.2 C7.2 C9.1 C10.2 C18.2 C19.2 C20.2 L1.2 P1.12 R1.2 R9.1 R13.1 R17.1 R21.2 TP3.1 U2.4 | length 823.7
  Top Layer w11.81: v1(1060,797.56) 1067.46,797.56 1079.43,809.53 R1.2 ; v1(1230,960) 1235.2,954.8 1275.28,954.8 1298.66,978.19 1302.6,978.19 1310.47,986.06 R21.2 ; TP3.1 1510,1260 1532.51,1282.51 1532.51,1319.21 1533.3,1320 1590,1320 ; P1.12 C5.2
  Bottom Layer w11.81: v1(1060,797.56) 1108.03,797.56 R13.1@1110.47,800 ; R17.1 C20.2@1172.44,1210 ; v1(1230,960) U2.4 ; R9.1 1353.23,795.83 v1(1400,795.83) ; U2.4 C7.2 U2.4
  other v1: 1500,522.44 1182.44,1210
  other v2: 1540,1330 1540,1410 1540,1490
+INA: R11.2 R12.2 U2.3 | length 228.2
  Bottom Layer w11.81: U2.3 1255.59,837.36 1261.5,831.46 1261.5,777.52 1272.6,766.42 1272.6,757.87 R12.2 1339.53,690.94 R11.2
+INB: R15.2 R16.2 U2.5 | length 228.2
  Bottom Layer w11.81: R15.2 1120.47,690.47 R16.2 1187.87,757.87 1187.87,766.89 1198.5,777.52 1198.5,831.46 1204.41,837.36 U2.5
+INC: R19.2 R20.2 U2.10 | length 217.8
  Bottom Layer w11.81: R19.2 R20.2 1117.56,1079.53 1137.09,1060 1197.49,1060 1204.41,1066.92 U2.10
-INA: R9.2 R10.1 U2.2 | length 176.5
  Bottom Layer w11.81: U2.2 1281.18,836.38 1290,827.56 ; R9.2 1290,827.56 ; R10.1 1342.44,850.47 1319.53,827.56 1290,827.56
-INB: R13.2 R14.1 U2.6 | length 176.8
  Bottom Layer w11.81: R14.1@1110,860 1110,855.59 1117.4,848.19 1121.81,848.19 1158.19,811.81 1162.13,811.81 1170,803.94 R13.2 1170,810 1170,827.56 1178.82,836.38 U2.6
-INC: R17.2 R18.1 U2.9 | length 214.4
  Bottom Layer w11.81: R17.2 1099.53,1150.94 R18.1 1099.53,1152.13 1107.4,1160 1169.73,1160 1176.65,1153.08 1176.65,1111.54 U2.9
ADC1: R10.2 U2.1 U3.13 | length 1191.2
  Top Layer w11.81: v1(450,710) 482.23,710 482.62,710.39 U3.13
  Bottom Layer w11.81: v1(450,710) 490,750 890,750 1022.91,882.91 1022.91,883.42 1030.99,891.5 1031.5,891.5 1140,1000 1279.53,1000 1358.19,921.34 1358.19,917.4 R10.2@1366.06,909.53 ; U2.1 1332.91,909.53 R10.2@1366.06,909.53 ; R10.2 R10.2@1366.06,909.53
ADC2: R14.2 U2.7 U3.14 | length 817.7
  Top Layer w11.81: v1(500,660) 501.92,661.92 501.92,693.71 502.31,694.1 U3.14
  Bottom Layer w11.81: v1(500,660) 550,710 900.47,710 R14.2 1050.47,863.94 1058.35,871.81 1062.28,871.81 1081.97,891.5 1151.06,891.5 1153.23,889.33 U2.7
ADC3: R18.2 U2.8 U3.19 | length 868.4
  Top Layer w11.81: v1(570,790) 600.34,759.66 600.34,727.06 600.73,726.67 U3.19
  Bottom Layer w11.81: v1(570,790) 720,790 920,990 920,1060 1010,1150 R18.2 ; 1040.47,1130 1040.47,1126.06 1057.17,1109.37 U2.8
ADC_I1: P1.10 R11.1 | length 243.5
  Bottom Layer w11.81: R11.1 1280.47,638.86 1306.54,612.8 1306.54,466.54 P1.10
ADC_I2: P1.9 R15.1 | length 254.7
  Bottom Layer w11.81: R15.1 1179.53,627.6 1160,608.07 1160,500 P1.9
ADC_I3: P1.8 R19.1 | length 687.9
  Top Layer w11.81: v1(905.7,817.95) 1000,723.64 1000,660 1100,560 P1.8
  Bottom Layer w11.81: v1(905.7,817.95) 907.95,817.95 1040,950 R19.1@1040,1010.47
BOOT0: R2.1 U3.44 | length 205.9
  Top Layer w11.81: U3.44 561.36,1006.87 598.23,970 v1(600,970)
  Bottom Layer w11.81: v1(600,970) 650,1020 R2.1
BOOT1: R3.2 U3.20 | length 528.5
  Top Layer w11.81: v1(570,840) 620.42,789.58 U3.20
  Bottom Layer w11.81: v1(570,840) 595.91,814.09 684.09,814.09 720,850 R3.2
DD_N: J1.A7 J1.B7 R8.2 | length 755.2
  Top Layer w10: R8.2 914.77,874.77 933.05,893.05 1373.05,893.05 1439.36,959.36 1520,959.36 ; J1.A7@1549.09,969.84 1530.17,969.84 1521.89,961.56 1521.89,961.25 1520,959.36 ; J1.B7@1550,929.57 1548.19,931.38 1528.62,931.38 1520,940 1520,959.36
DD_P: J1.A6 J1.B6 R6.2 R7.2 | length 878.9
  Top Layer w10: R7.2 918.66,931.34 936.95,913.05 1364.77,913.05 1431.08,979.36 1511.4,979.36 1521.88,989.84 1562.68,989.84 J1.B6 1594.3,989.53 1600.16,983.67 1600.16,956.02 1594.3,950.16 J1.A6 ; R7.2@887.19,935.27 900.09,948.17 R6.2@900.09,986.66
GND: C1.2 C2.2 C3.2 C4.2 C5.1 C6.1 C7.1 C8.2 C9.2 C10.1 C12.1 C13.1 C16.1 C17.1 C18.1 C19.1 C20.1 DL1.1 DL2.1 DL3.1 DL4.1 H2.4 H2.6 H2.10 J1.A1_B12 J1.B1_A12 P1.11 P2.3 P3.3 R4.2 R5.2 R12.1 R16.1 R20.1 TP1.1 U1.2 U2.11 U2.12 U2.13 U3.8 U3.23 U3.35 U3.47 | length 2227.8
  Top Layer w11.81: v1(370,1360) 417.01,1360 DL4.1 ; U3.8 468.54,853.55 482.54,867.56 v1(490,867.56) ; U3.47 502.31,1055.8 502.7,1056.19 502.7,1099.64 517.52,1114.46 C13.1@517.52,1129.33 ; v1(520,1200) 518.76,1198.76 518.76,1144.71 C13.1 520.99,1140 v1(570,1140) ; 610,620 660.19,620 C16.1 ; DL3.1 657.01,1362.99 v1(660,1360) ; v1(660,570) 660.2,570.2 660.2,620.01 C16.1 ; U3.23@679.47,704.37 679.47,667.8 660.4,648.72 C16.1 ; U3.35 801.66,971.66 810.93,980.93 836.53,980.93 843.52,987.93 C6.1@843.52,988.63 ; v1(1060,742.44) 1065.27,737.17 1065.27,724.73 1071.34,718.66 ; 1066,713.32 1069.34,716.66 1073.34,716.66 1092.44,697.56 C4.2 ; DL2.1@1170,1040 v1@1230.17,1040 ; U1.2 1229.05,748.36 1229.05,700.95 v1(1230,700) ; TP1.1 1230,1040.17 v1@1230.17,1040 ; v1(1230.78,1039.39) v1@1230.17,1040 ; DL1.1@1290,1040 v1@1230.17,1040 ; C2.2 1385.67,737.17 1394.73,737.17 v1(1400,742.44) ; v1(1450,1090) 1450.47,1089.53 R5.2 ; v1@1450.47,830.47 R4.2@1499.55,830.47 ; C5.1 v1(1500,650) ; v1@1500.02,780.02 R4.2@1500.02,830.45 ; R4.2 1559.45,830.47 J1.A1_B12 ; v1(1500,1140) R5.2 ; J1.B1_A12@1562.99,1089.53 R5.2 ; C9.2 1760,1367.56 v2(1760,1360) C8.2 ; C10.1 v2(1780,1500)
  Bottom Layer w11.81: v1(290,520) 295.27,525.27 295.27,538.23 305.08,548.03 340.47,548.03 C1.2 ; C17.1@487.09,870.47 v1(490,867.56) ; C17.1@495,862.56 v1(490,867.56) ; C17.1@495,868.08 490.52,868.08 v1(490,867.56) ; v1(1060,742.44) 1113.39,742.44 R16.1 ; 1203.11,1027.93 1219.32,1027.93 v1(1230.78,1039.39) 1230,1040.17 U2.11 ; C20.1@1227.56,1200 1230,1197.56 U2.11 ; C20.1@1227.56,1210 1300,1210 1302.42,1207.58 ; v1(1230,700) C7.1 ; U2.13 U2.12 U2.11 ; R12.1 1347.09,742.44 v1(1400,742.44)
  other v1: 1586.64,646.64 1500,780 42.64,792.64 1450,830 654,924 40,960 150,960 840,982.44 1237.56,1210 142.64,1232.64 146,1494 306,1494 1390,1600 1172.64,1602.64 1280.64,1602.64 732.64,1712.64 842.64,1712.64 952.64,1712.64 1062.64,1712.64 1172.64,1712.64 1282.64,1712.64 1390.64,1712.64
GPIO1: H1.1 R27.2 | length 140.5
  Bottom Layer w11.81: H1.1@130,1080 R27.2
GPIO2: H1.2 R28.2 | length 158.8
  Bottom Layer w11.81: H1.2@130,1380 H1.2 220,1380 R28.2
GPIO3: P1.5 U3.25 | length 367.2
  Top Layer w11.81: U3.25 785.19,774.81 820,740 820,490.54 800,470.54 P1.5
GPIO4: P1.6 U3.26 | length 417.8
  Top Layer w11.81: U3.26 795.5,794.5 880,710 880,490.54 900,470.54 P1.6
JTCK: H2.7 U3.37 | length 678
  Top Layer w11.81: U3.37 699.16,1072.06 699.55,1072.45 702.45,1072.45 840,1210 1130,1210 1240,1320 H2.7
JTDI: H2.3 U3.38 | length 519.6
  Top Layer w11.81: U3.38 679.47,1109.47 820,1250 980,1250 H2.3
JTDO: H2.5 U3.39 | length 679.4
  Top Layer w11.81: U3.39 659.79,1159.79 v1(780,1280)
  Bottom Layer w11.81: v1(780,1280) 780.7,1280 800.7,1260 1070,1260 H2.5@1140,1330
JTMS: H2.9 U3.34 | length 904.3
  Top Layer w11.81: U3.34 708.02,951.98 700.56,959.44 700.56,990.56 873.46,1163.46 1243.46,1163.46 1350,1270 H2.9
JTNRST: H2.1 U3.40 | length 535.4
  Top Layer w11.81: U3.40 640.1,1240.1 720,1320 H2.1
MCPWM1: P1.7 U3.29 | length 518.9
  Top Layer w11.81: U3.29 755.85,853.16 796.84,853.16 930,720 930,650 1000,580 P1.7
MCPWM2: P1.4 U3.18 | length 313.6
  Top Layer w11.81: U3.18 581.05,568.95 690,460 P1.4
NetC3_1: C3.1 R1.1 U1.1 U1.3 | length 246.1
  Top Layer w11.81: R1.1 1189.53,750.47 U1.3 1190,780 1202.2,792.2 1210,800 1252.6,800 1262.44,809.84 C3.1 1264.8,807.64 U1.1
NetC4_1: C4.1 U1.4 | length 61.5
  Top Layer w11.81: C4.1@1130,640 1186.3,640 U1.4
NetC11_1: C11.1 C14.1 | length 70.7
  Top Layer w11.81: C14.1 C11.1
NetDL1_2: DL1.2 R21.1 | length 52.7
  Top Layer w11.81: DL1.2 1362.99,996.54 R21.1
NetDL2_2: DL2.2 R23.1 | length 73.2
  Top Layer w11.81: DL2.2 1147.01,990 R23.1
NetDL3_2: DL3.2 R25.1 | length 84.9
  Top Layer w11.81: R25.1@550,1360 DL3.2
NetDL4_2: DL4.2 R26.1 | length 85.1
  Top Layer w11.81: DL4.2 479.53,1359.53 R26.1 R26.1@480.47,1359.53
NetJ1_A5: J1.A5 R4.1 | length 63.7
  Top Layer w11.81: R4.1@1503.94,899.53 1515.2,910.79 J1.A5
NetJ1_B5: J1.B5 R5.1 | length 73
  Top Layer w11.81: R5.1@1490,1028.9 J1.B5
NetP2_2: P2.2 R2.2 | length 546.7
  Bottom Layer w11.81: P2.2 490,1560 600,1450 600,1340 650,1290 R2.2
NetP3_2: P3.2 R3.1 | length 685.7
  Bottom Layer w11.81: P3.2 540,1660 540,1567.84 720,1387.84 R3.1
NetR27_1: R27.1 U3.21 | length 585.4
  Top Layer w11.81: v1@617.44,850.12 640.1,827.45 U3.21
  Bottom Layer w11.81: R27.1 492.16,1080 540,1032.16 540,927.56 v1(617.39,850.12)
NetR28_1: R28.1 U3.22 | length 719.9
  Top Layer w11.81: U3.22 660.18,718.91 660.18,806.16 660.79,806.77 660.79,846.11 v1(664.76,850.08)
  Bottom Layer w11.81: R28.1 560,1040 560,954.84 v1(664.76,850.08)
nRST: U3.7
OSC_I: C14.2 R24.1 U3.5 Y1.1 | length 471.4
  Top Layer w11.81: C14.2 Y1.1@139.4,712 ; Y1.1@139.4,740.29 Y1.1@139.4,712 ; Y1.1@156.24,728.84 Y1.1@139.4,712 ; Y1.1 156.24,785.77 R24.1 283.08,912.61 U3.5
OSC_O: C11.2 R24.2 U3.6 Y1.2 | length 395.7
  Top Layer w11.81: Y1.2@307.66,738.84 Y1.2@320.35,726.14 ; Y1.2 289.53,785.25 289.53,863.94 297.4,871.81 301.34,871.81 322.45,892.92 U3.6 ; C11.2 Y1.2@320.35,726.14 ; Y1.2@320.35,754.43 Y1.2@320.35,726.14
PA11: R8.1 U3.32 | length 82.4
  Top Layer w11.81: U3.32 795.88,912.61 R8.1@825.57,882.92
PA12: R7.1 U3.33 | length 48.3
  Top Layer w11.81: U3.33@780.26,932.29 827.17,932.29 R7.1
SCL: P1.3 U3.45 | length 728.3
  Top Layer w11.81: v1(490.04,932.71) 497.5,932.71 504.78,940 510,940 541.68,971.68 U3.45
  Bottom Layer w11.81: v1(490.04,932.71) 410,852.67 410,650 P1.3
SDA: P1.2 U3.46 | length 690.8
  Top Layer w11.81: v1(490,980) 494.9,980 521.99,1007.1 U3.46
  Bottom Layer w11.81: v1(490,980) 390,880 390,642.16 500,532.16 P1.2
STAT0: R25.2 U3.1 | length 466.6
  Top Layer w7.87: U3.1 378.65,991.35 360,1010 360,1150 460,1250 499.06,1250 R25.2@550,1300.94
STAT1: R26.2 U3.2 | length 450.8
  Top Layer w7.87: U3.2 424.75,973.24 374.49,973.24 344.25,1003.48 344.25,1168.66 476.06,1300.47 R26.2
VUSB: C8.1 J1.A4_B9 J1.B4_A9 L1.1 TP4.1 | length 404.4
  Top Layer w11.81: J1.A4_B9 1585.24,865.51 1634.64,914.91 1634.64,1005.09 1585.24,1054.49 J1.B4_A9 ; TP4.1 1680,810
pads on no net: H2.8 J1. J1.A8 J1.B8 J1.S1 J1.S2 J1.S3 J1.S4 MT1.1 MT2.1 MT3.1 MT4.1 U2.14 U3.3 U3.4 U3.10 U3.11 U3.12 U3.15 U3.16 U3.17 U3.27 U3.28 U3.30 U3.31 U3.41 U3.42 U3.43

## Polygon pours and split planes (outlines as drawn)
GND on Top Layer "GND_L01_P005" (solid, remove dead copper, pour order 5): -80,1840 -70,1850 1870,1850 1870,300 1860,310 -90,310
VUSB on Top Layer "NONET_L01_P-001" (solid, pour order 0): 1840,1240 1570,1240 1540,1210 1540,760 1840,760
GND on Bottom Layer "GND_L04_P004" (solid, remove dead copper, pour order 4): -70,1820.07 -60,1830.07 1880,1830.07 1880,280.07 1870,290.07 -80,290.07
GND on Bottom Layer "NONET_L01_P-001" (solid, pour order 3): 1530,1250 1200,1250 1200,1010 1530,1010
3V3 on Int2 (PWR) (split plane): 1464.9,1362.11 1367.89,1265.1 1100,1265.1 1098.05,1264.71 1096.4,1263.6 1016.4,1183.6 1015.29,1181.95 1014.9,1180 1014.9,990 1014.9,720 1015.29,718.05 1016.4,716.4 1116.4,616.4 1118.05,615.29 1120,614.9 1347.89,614.9 1394.9,567.89 1394.9,370.1 -29.9,370.1 -29.9,1789.9 1464.9,1789.9
5V on Int2 (PWR) (split plane): 1814.9,370.1 1405.1,370.1 1405.1,570 1404.71,571.95 1403.6,573.6 1353.6,623.6 1351.95,624.71 1350,625.1 1122.11,625.1 1025.1,722.11 1025.1,990 1025.1,1177.89 1102.11,1254.9 1370,1254.9 1371.95,1255.29 1373.6,1256.4 1473.6,1356.4 1474.71,1358.05 1475.1,1360 1475.1,1789.9 1814.9,1789.9
GND on Int1 (GND) (split plane): 1814.9,370.1 -29.9,370.1 -29.9,1789.9 1814.9,1789.9

## Other copper
Top Layer:
  rectangle net 5V: 1500,1300 1700,1520
  region net 3V3: 1160,530 1160,610 1210,610 1220,620 1220,665 1400,665 1400,530
Bottom Layer:
  region net GND: 1191.11,1014.05 1235.95,1014.05 1235.95,1040 1189.3,1040
  region net GND: 1230,1153.46 1236.54,1160 1280,1160 1280,1014.52 1279.53,1014.05 1235.95,1014.05 1230,1020
Int2 (PWR) (plane layer: these items are gaps in the copper):
  lines w10: 1400,330 1400,570 1350,620 1120,620 1020,720 1020,990 1020,1180 1100,1260 1370,1260 1470,1360 1470,1840

## Silkscreen, mask and mechanical layers (free items; w line width, h text height)
Top Overlay:
  text "3V3" at 410,540 h31.5 r90
  text "SCL" at 610,540 h31.5 r90
  text "SDA" at 520,530 h31.5 r90
  text "GP3" at 760,530 h31.5
  text "GP4" at 920,530 h31.5 r90
  text "PWM1" at 1010,530 h31.5 r90
  text "ADC3" at 1040,530 h31.5
Bottom Overlay:
  text "GP3" at 850,560 h31.5
  text "GP4" at 880,530 h31.5 r270
  text "GND" at 1390,530 h31.5 r270
  text "SDA" at 480,520 h31.5 r270
  text "SCL" at 580,520 h31.5 r270
  text "PWM1" at 980,520 h31.5 r270
Board Shape:
  the board outline again, w10

## Text inside footprints (layer, text, board x,y; h text height)
H2: Top Overlay "2" at 940,1480 h31.5; Top Overlay "1" at 950,1240 h31.5; Top Overlay "10" at 1330,1480 h31.5; Top Overlay "9" at 1340,1230 h31.5
J1: Mechanical 13 "PCB EDGE" at 1824.8,1164.72 h24 r90